# Altium PCB UF_Servo.PcbDoc (part 3 of 12)
Units mm, origin at the board's own origin, x right, y up, seen from the top; angles counter-clockwise.
Board outline 222.63 x 100.1 mm, 6 copper layers (L1, L2, L3, L4, L5, L6), stack 1.609 mm thick; 1138 components, 775 nets, 3720 pads, 1641 vias.
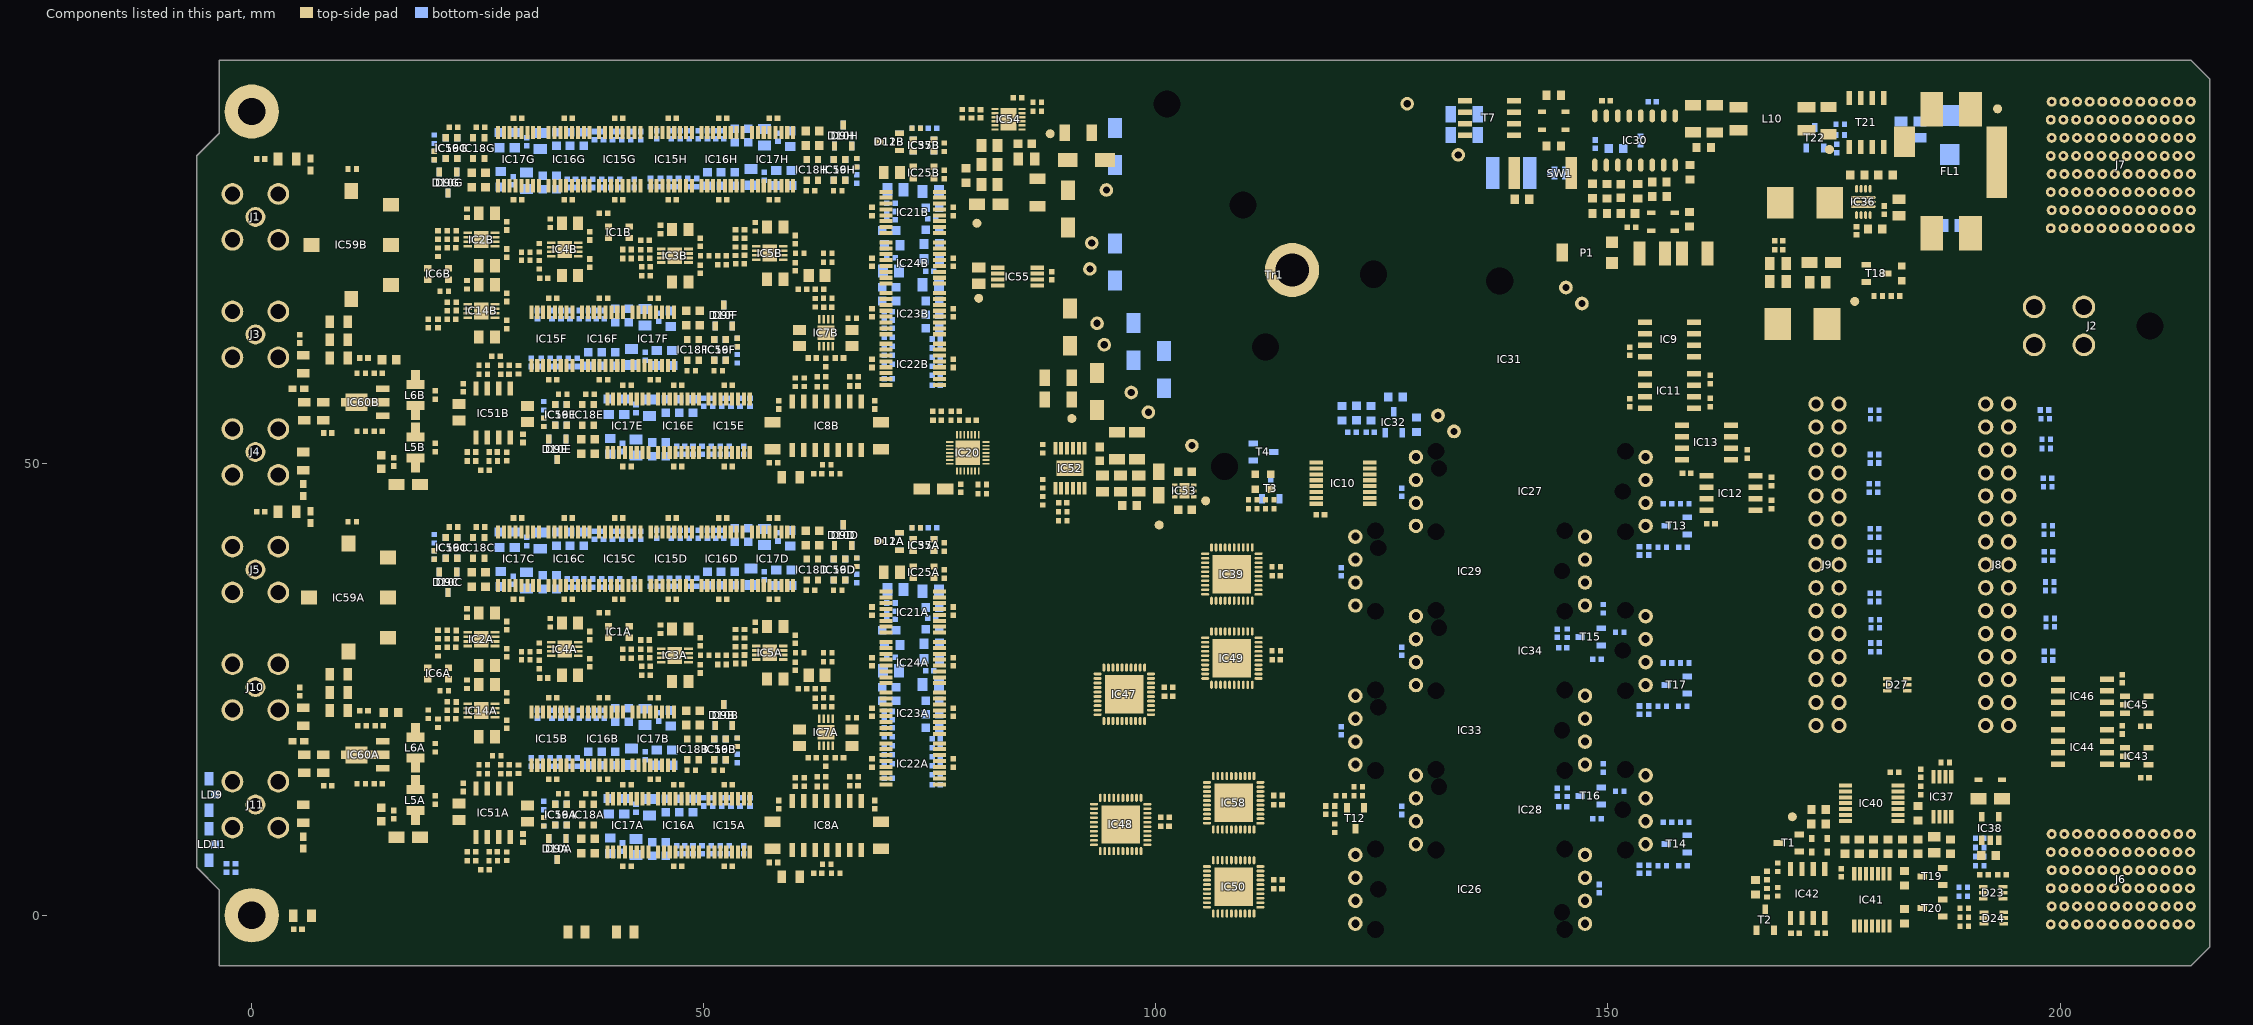
[diagram p7: the components of this part, seen from the top]

## Footprints (in the part's own frame and the unit in brackets; to place one, negate y for a bottom-side part, rotate by r counter-clockwise, add the part's x,y. Pads: shape width x height; smd on the part's side, far side on the other; paste and mask are expansions set on the pad)
3M_N2530-6002RB [mm] "30 Contacts - Straight .100\" x .100\" Low Profile Four-Wall Header"
  round 1.7 hole 1: 1(-17.78,-1.27) 2(-17.78,1.27) 3(-15.24,-1.27) 4(-15.24,1.27) 5(-12.7,-1.27) 6(-12.7,1.27) 7(-10.16,-1.27) 8(-10.16,1.27) 9(-7.62,-1.27) 10(-7.62,1.27) 11(-5.08,-1.27) 12(-5.08,1.27) 13(-2.54,-1.27) 14(-2.54,1.27) 15(0,-1.27) 16(0,1.27) 17(2.54,-1.27) 18(2.54,1.27) 19(5.08,-1.27) 20(5.08,1.27) 21(7.62,-1.27) 22(7.62,1.27) 23(10.16,-1.27) 24(10.16,1.27) 25(12.7,-1.27) 26(12.7,1.27) 27(15.24,-1.27) 28(15.24,1.27) 29(17.78,-1.27) 30(17.78,1.27)
  silkscreen extent -22.71,-4.85 22.71,4.52, body extent -22.71,-4.11 22.71,4.52, height 9.91
AMPHENOL_132203-12 [mm] "50 Ohm Through Hole SMA Right Angle PCB Jack"
  round 2.2 hole 1.5: 1(0,0)
  round 2.4 hole 1.7: 2(-2.54,2.54) 2(-2.54,-2.54) 2(2.54,2.54) 2(2.54,-2.54)
  silkscreen extent -4,-5.1 19.12,5.1, body extent -4,-5.1 19.05,5.1, height 11.45
AMPHENOL_10052825-101LF [mm] "72 Contacts, 2mm Pitch, 6 Columns, 4 Pairs per Column, 4 Walls, Right Angle Header"
  round 1.1 hole 0.5: A1(-5,-7.65) A2(-3,-7.75) A3(-1,-7.65) A4(1,-7.75) A5(3,-7.65) A6(5,-7.75) B1(-5,-6.25) B2(-3,-6.35) B3(-1,-6.25) B4(1,-6.35) B5(3,-6.25) B6(5,-6.35) C1(-5,-4.85) C2(-3,-4.95) C3(-1,-4.85) C4(1,-4.95) C5(3,-4.85) C6(5,-4.95) D1(-5,-3.45) D2(-3,-3.55) D3(-1,-3.45) D4(1,-3.55) D5(3,-3.45) D6(5,-3.55) E1(-5,-2.05) E2(-3,-2.15) E3(-1,-2.05) E4(1,-2.15) E5(3,-2.05) E6(5,-2.15) F1(-5,-0.65) F2(-3,-0.75) F3(-1,-0.65) F4(1,-0.75) F5(3,-0.65) F6(5,-0.75) G1(-5,0.75) G2(-3,0.65) G3(-1,0.75) G4(1,0.65) G5(3,0.75) G6(5,0.65) H1(-5,2.15) H2(-3,2.05) H3(-1,2.15) H4(1,2.05) H5(3,2.15) H6(5,2.05) I1(-5,3.55) I2(-3,3.45) I3(-1,3.55) I4(1,3.45) I5(3,3.55) I6(5,3.45) J1(-5,4.95) J2(-3,4.85) J3(-1,4.95) J4(1,4.85) J5(3,4.95) J6(5,4.85) K1(-5,6.35) K2(-3,6.25) K3(-1,6.35) K4(1,6.25) K5(3,6.35) K6(5,6.25) L1(-5,7.75) L2(-3,7.65) L3(-1,7.75) L4(1,7.65) L5(3,7.75) L6(5,7.65)
  silkscreen extent -6.95,-9.45 6.95,11.85, body extent -6.95,-21.95 6.95,11.85, height 15.25
AMPHENOL_10052838-101LF [mm] "96 Contacts, 2mm Pitch, 8 Columns, 4 Pairs per Column, 4 Walls, Right Angle Header"
  round 1.1 hole 0.5: A1(-7,-7.65) A2(-5,-7.75) A3(-3,-7.65) A4(-1,-7.75) A5(1,-7.65) A6(3,-7.75) A7(5,-7.65) A8(7,-7.75) B1(-7,-6.25) B2(-5,-6.35) B3(-3,-6.25) B4(-1,-6.35) B5(1,-6.25) B6(3,-6.35) B7(5,-6.25) B8(7,-6.35) C1(-7,-4.85) C2(-5,-4.95) C3(-3,-4.85) C4(-1,-4.95) C5(1,-4.85) C6(3,-4.95) C7(5,-4.85) C8(7,-4.95) D1(-7,-3.45) D2(-5,-3.55) D3(-3,-3.45) D4(-1,-3.55) D5(1,-3.45) D6(3,-3.55) D7(5,-3.45) D8(7,-3.55) E1(-7,-2.05) E2(-5,-2.15) E3(-3,-2.05) E4(-1,-2.15) E5(1,-2.05) E6(3,-2.15) E7(5,-2.05) E8(7,-2.15) F1(-7,-0.65) F2(-5,-0.75) F3(-3,-0.65) F4(-1,-0.75) F5(1,-0.65) F6(3,-0.75) F7(5,-0.65) F8(7,-0.75) G1(-7,0.75) G2(-5,0.65) G3(-3,0.75) G4(-1,0.65) G5(1,0.75) G6(3,0.65) G7(5,0.75) G8(7,0.65) H1(-7,2.15) H2(-5,2.05) H3(-3,2.15) H4(-1,2.05) H5(1,2.15) H6(3,2.05) H7(5,2.15) H8(7,2.05) I1(-7,3.55) I2(-5,3.45) I3(-3,3.55) I4(-1,3.45) I5(1,3.55) I6(3,3.45) I7(5,3.55) I8(7,3.45) J1(-7,4.95) J2(-5,4.85) J3(-3,4.95) J4(-1,4.85) J5(1,4.95) J6(3,4.85) J7(5,4.95) J8(7,4.85) K1(-7,6.35) K2(-5,6.25) K3(-3,6.35) K4(-1,6.25) K5(1,6.35) K6(3,6.25) K7(5,6.35) K8(7,6.25) L1(-7,7.75) L2(-5,7.65) L3(-3,7.75) L4(-1,7.65) L5(1,7.75) L6(3,7.65) L7(5,7.75) L8(7,7.65)
  silkscreen extent -8.95,-9.45 8.95,11.85, body extent -8.95,-21.95 8.95,11.85, height 15.25
BROADCOM_AFBR-390525RZ [mm] "BROADCOM AFBR-390525RZ Case, Body 30.46mm L X 10.16mm W X 6.7mm H"
  round 1.6 hole 0.9: 1(-12.7,3.81) 2(-12.7,1.27) 3(-12.7,-1.27) 4(-12.7,-3.81) 5(12.7,3.81) 6(12.7,1.27) 7(12.7,-1.27) 8(12.7,-3.81)
  round 1 hole 1.85 unplated mask+0.425: 9(-10.47,4.45) 11(-10.47,-4.45) 12(10.47,4.45) 14(10.47,-4.45)
  round 1 hole 1.8 unplated mask+0.4: 10(-10.16,0) 13(10.16,-2.54)
  silkscreen extent -15.23,-5.08 15.23,5.08, body extent -15.23,-5.08 15.23,5.08, height 6.7
C100 [mm] "1mm Diameter SMD Pad"
  round 1 smd paste-0.5: 1(0,0)
CAPC1005X55N [mm] "Capacitor, Non-Polarized, Chip; 1.00mm L X 0.50mm W X 0.70mm H, IPC Medium Density"
  rect 0.62x0.62 smd: 1(-0.45,0) 2(0.45,0)
  body extent -0.52,-0.27 0.53,0.28, height 0.55
CAPC1608X87N [mm] "Chip Capacitor, Body 1.6x0.8mm IPC Medium Density"
  rect 0.95x1 smd: 1(-0.8,0) 2(0.8,0)
  body extent -0.87,-0.47 0.88,0.48, height 0.87
CAPC1608X90N [mm] "Chip Capacitor, Body 1.6x0.8mm IPC Medium Density"
  rect 0.95x0.95 smd: 1(-0.75,0) 2(0.75,0)
  body extent -0.85,-0.45 0.85,0.45, height 0.9
CAPC1810X06N [mm] "Chip Capacitor, 2-Leads, Body 1.80x1.00mm, IPC Medium Density"
  rect 1x1.15 smd: 1(-0.85,0) 2(0.85,0)
  body extent -0.95,-0.55 0.95,0.55, height 0.65
CAPC2012X95N [mm] "Chip Capacitor, Body 2.0x1.25mm, IPC Medium Density"
  rect 1.1x1.45 smd: 1(-0.9,0) 2(0.9,0)
  silkscreen extent 0,-0.58 0,0.58, body extent -1.05,-0.67 1.05,0.68, height 0.95
CAPC2012X135N [mm] "Chip Capacitor, Body 2.0x1.25mm, IPC Medium Density"
  rect 1.05x1.4 smd: 1(-0.9,0) 2(0.9,0)
  silkscreen extent 0,-0.58 0,0.58, body extent -1.05,-0.67 1.05,0.68, height 1.25
CAPC2012X140N [mm] "Chip Capacitor, Body 2.0x1.25mm, IPC Medium Density"
  rect 1.15x1.45 smd: 1(-0.9,0) 2(0.9,0)
  silkscreen extent 0,-0.58 0,0.58, body extent -1.05,-0.67 1.05,0.68, height 1.3
CAPC3216X180N [mm] "Chip Capacitor, Body 3.2x1.6mm, IPC Medium Density"
  rect 1.15x1.8 smd: 1(-1.5,0) 2(1.5,0)
  silkscreen extent -0.55,-0.8 0.55,0.8, body extent -1.7,-0.9 1.7,0.9, height 1.8
CAPC3225X200N [mm] "Chip Capacitor, Body 3.2x2.5mm, IPC Medium Density"
  rect 1.35x2.7 smd: 1(-1.4,0) 2(1.4,0)
  silkscreen extent -0.35,-1.25 0.35,1.25, body extent -1.7,-1.35 1.5,1.35, height 2
CAPC4532X250N [mm] "Chip Capacitor, 2-Leads, Body 4.5x3.2mm, IPC Medium Density"
  rect 1.5x3.5 smd: 1(-2.05,0) 2(2.05,0)
  silkscreen extent -0.95,-1.6 0.95,1.6, body extent -2.37,-1.7 2.38,1.7, height 2.5
CAPMP3216X180N [mm] "Capacitor, Polarized, Molded  Body 3.2x1.6mm, IPC Medium Density"
  rect 1.8x1.25 smd: 1(-1.3,0) 2(1.3,0)
  silkscreen extent -2.4,-0.7 0,1.25, body extent -1.7,-0.9 1.7,0.9, height 1.6
DIOM5127X229N [mm] "DO-214-AC/SMA Diode, Molded Body; 5.10mm L X 2.67mm W X 2.29mm H, IPC Medium Density"
  rect 2.2x1.55 smd: 1(-2.05,0) 2(2.05,0)
  silkscreen extent -3.42,-1.4 2.65,1.45, body extent -2.67,-1.45 2.68,1.45, height 2.29
DIOM5336X265N [mm] "DO-214-AA/SMB Diode, Molded Body; 5.34mm L X 3.625mm W X 2.65mm H, IPC Medium Density"
  rect 2.3x2.15 smd: 1(-2.15,0) 2(2.15,0)
  silkscreen extent -3.92,-1.8 2.65,1.8, body extent -2.7,-1.95 2.7,1.95, height 2.4
EATON_0402ESDA-MLP [mm] "0402, 2-Leads, Body 1.1mm L X 0.53mm W X 0.44mm H body, IPC Medium Density"
  rect 0.9x0.7 smd: 1(-0.65,0) 2(0.65,0)
  body extent -0.6,-0.3 0.6,0.3, height 0.44
FIL_MURATA_BNX02 [mm] "Block Type EMIFIL LC Combined Type, BNX02* Series"
  rect 3.8x2.5 smd: 1(-6.85,2.1) 2(6.85,2.1) 3(-6.85,-2.2) 4(6.85,-2.2)
  rect 7.9x2.3 smd: 4(1,-5.1)
  rect 3.4x2.3 smd: 4(3.25,5.1)
  silkscreen extent -5.95,-4.45 7.77,5.05, body extent -6.05,-4.55 6.05,4.55, height 3.1
IND_MURATA_LQH32C [mm] "Chip Inductor, 3.40mm L X 2.50mm W X 2.20mm H, MURATA LQH32 Series"
  rect 1.2x1 smd: 1(-2.15,0) 2(2.15,0)
  rect 1x2 smd: 1(-1.15,0) 2(1.15,0)
  silkscreen extent -2.05,-1.4 2.05,1.4, body extent -1.75,-1.25 1.75,1.25, height 2.2
IND_WURTH_WE-LHMI_7050 [mm] "SMD Power Inductor (We-LHMI Series), Body 7.6x6.9mm"
  rect 2.95x3.5 smd: 1(-2.725,0) 2(2.725,0)
  L1 keep-out region: 1.1,-3.45 1.1,3.45 -1.1,3.45 -1.1,-3.45
  silkscreen extent -3.8,-3.45 3.8,3.45, body extent -3.65,-3.3 3.65,3.3, height 4.8
IND_WURTH_WE-SL2 [mm] "Common Mode SMD Line Filter WE-SL2"
  rect 2x1.2 smd: 1(-3.75,1.27) 2(-3.75,-1.27) 3(3.75,-1.27) 4(3.75,1.27)
  silkscreen extent -4.75,-3.15 4.75,3.15, body extent -4.75,-3.15 4.75,3.15, height 5.3
INDC1608X95N [mm] "Chip Inductor, 2-Leads, EIA 0603, Metric 1608, Body 1.6x0.8mm, IPC Medium Density"
  rect 0.95x1 smd: 1(-0.8,0) 2(0.8,0)
  body extent -0.87,-0.47 0.88,0.48, height 0.95
INDC2113X60N [mm] "Chip Inductor, EIA 0805, Metric 2012, Body 2.1x1.25mm, IPC Medium Density"
  rect 1.2x1.45 smd: 1(-0.9,0) 2(0.9,0)
  body extent -1.05,-0.62 1.05,0.63, height 0.6
JUMPSMD0805_G50 [mm] "2 SMD Pads for Bound by Solder Drop - Equivalent Size 0805 - Gap 0.5mm"
  rect 0.475x0.45 smd paste-0.225: 1(-1.188,0) 2(1.188,0)
  rect 0.7x1.4 smd paste-0.35: 1(-0.6,0) 2(0.6,0)
  L1 region: -0.25,0.7 -0.95,0.7 -1.425,0.225 -1.425,-0.225 -0.95,-0.7 -0.25,-0.7
  L1 region: 0.25,-0.7 0.95,-0.7 1.425,-0.225 1.425,0.225 0.95,0.7 0.25,0.7
  L1 keep-out region: -0.05,0.7 0.05,0.7 0.05,-0.7 -0.05,-0.7
LED_AVAGO_HSMC-C110 [mm] "Red Chip LED, 2-Leads, Body 3.3x1.6mm, Side Emitting Package"
  rect 1.5x1 smd: 1(-1.75,0) 2(1.75,0)
  rect 0.9x0.9 smd: 3(0,-0.65)
  silkscreen extent -1.87,-1.28 0.86,1.3, body extent -1.65,-0.3 1.65,1.29, height 1
LED_AVAGO_HSME-C110 [mm] "Green Chip LED, 2-Leads, Body 3.3x1.6mm, Side Emitting Package"
  rect 1.5x1 smd: 1(-1.75,0) 2(1.75,0)
  rect 0.9x0.9 smd: 3(0,-0.65)
  silkscreen extent -1.87,-1.28 0.86,1.3, body extent -1.65,-0.3 1.65,1.29, height 1
LED_KINGBRIGHT_KP-1608CGCK [mm] "SMT Green LED, Case 0603, Body L 1.60mm x W 0.80mm x H 1.10mm"
  rect 0.8x0.8 smd: 1(-0.825,0) 2(0.825,0)
  silkscreen extent -1.82,-0.4 0.08,0.4, body extent -0.8,-0.4 0.8,0.4, height 1.1
MINI-CIRCUITS_DF782 [mm] "MINI-CIRCUITS DF782 Case, 1.50mm pitch; 4 pin, 2.44mm W X 4.49mm L"
  rect 0.71x1.5 smd: 1(-1.5,-1.915) 3(1.5,-1.915)
  rect 0.917x2.41 smd: 2(0,-1.46)
  rect 0.92x0.493 smd: 4(0,2.418)
  rect 1.905x2.427 smd: 4(0,0.958)
  L1 region: -0.457,-0.751 -0.953,-0.255 -0.953,2.172 -0.46,2.665 0.46,2.665 0.953,2.172 0.953,-0.255 0.457,-0.751 0.457,-2.665 -0.457,-2.665
  silkscreen extent -2.3,-1.3 2.3,1.3, body extent -2.3,-2.12 2.3,2.12, height 1.6
MINI-CIRCUITS_TTT167 [mm] "MINI-CIRCUITS TTT167 Case, 6 pin, 9.65mm W X 12.7mm L"
  rect 1.78x1.52 smd: 1(5.97,0) 2(-5.97,0)
  rect 1.52x1.78 smd: 3(0,-4.38) 4(0,4.38) 5(-4.44,-4.38) 6(4.44,-4.38)
  L1 region: -7.112,-1.903 -3.81,-1.903 -3.81,1.903 -7.112,1.903 -7.112,5.588 7.112,5.588 7.112,1.903 3.81,1.903 3.81,-1.903 7.112,-1.903 7.112,-5.588 1.903,-5.588 1.903,-2.22 -1.903,-2.22 -1.903,-5.588 -7.112,-5.588
  silkscreen extent -6.35,-6.13 6.35,4.83, body extent -6.35,-4.82 6.35,4.83, height 5.84
MOLEX_39-30-0040 [mm] "4.20mm (.165\") Pitch Mini-Fit Jr. Header, Dual Row, Right Angle with Snap-in Plastic Peg PCB Lock, 4 Circuits"
  round 2.5 hole 1.8: 1(-2.1,2.75) 2(2.1,2.75) 3(-2.1,-2.75) 4(2.1,-2.75)
  round 1 hole 3 unplated mask+1: 5(0,10.05)
  silkscreen extent -5.2,-1.24 4.8,16.28, body extent -5.2,-3.28 4.8,16.65, height 11.4
MTG300 [mm] "Non Plated Through Hole: Hole Dia.=3.0mm"
  round 0.5 hole 3 unplated mask+1.25: 1(0,0)
MTG300_600 [mm] "Plated Through Hole: Hole Dia.=3.0mm Pad Dia.=6.0mm"
  round 6 hole 3: 1(0,0)
OPI1264C [mil] "Low‐cost plastic housing"
  round 60 hole 30: 1(393.7,-49.21) 2(393.7,49.21) 3(-393.7,49.21) 4(-393.7,-49.21)
  silkscreen extent -350,-128 350,128, body extent -403,-129 404,130, height 230
PANASONIC_AQY22(SON) [mm] "PANASONIC Serie AQY22(SON)  Small Outline No Lead, 4 pins, 2.2x2.95mm"
  rect 0.8x0.7 smd: 1(-1.15,0.635) 2(-1.15,-0.635) 3(1.15,-0.635) 4(1.15,0.635)
  silkscreen extent -2.35,-1.1 0.4,1.1, body extent -1.47,-1.1 1.48,1.1, height 1.4
QFN40P400X400X100-29N-S270 [mm] "QFN, 0.40mm Pitch, Square; 28 Pin, 4.00mm L X 4.00mm W X 0.80mm H Body (w/Thermal Tab 2.7x2.7mm), IPC Medium Density"
  rect 0.8x0.2 smd: 1(-2,1.2) 2(-2,0.8) 3(-2,0.4) 4(-2,0) 5(-2,-0.4) 6(-2,-0.8) 7(-2,-1.2) 15(2,-1.2) 16(2,-0.8) 17(2,-0.4) 18(2,0) 19(2,0.4) 20(2,0.8) 21(2,1.2)
  rect 0.2x0.8 smd: 8(-1.2,-2) 9(-0.8,-2) 10(-0.4,-2) 11(0,-2) 12(0.4,-2) 13(0.8,-2) 14(1.2,-2) 22(1.2,2) 23(0.8,2) 24(0.4,2) 25(0,2) 26(-0.4,2) 27(-0.8,2) 28(-1.2,2)
  rect 2.7x2.7 smd: 29(0,0)
  silkscreen extent -3.12,-2 2,2, body extent -2,-2 2,2, height 1
QFN50P600X600X80-41N-S425 [mm] "QFN, 0.50mm Pitch, Square; 40 Pin, 6.00mm L X 6.00mm W X 0.80mm H body (w/Thermal Tab 4.25 x 4.25mm), IPC Medium Density"
  oval 0.9x0.3 smd: 1(-2.95,2.25) 2(-2.95,1.75) 3(-2.95,1.25) 4(-2.95,0.75) 5(-2.95,0.25) 6(-2.95,-0.25) 7(-2.95,-0.75) 8(-2.95,-1.25) 9(-2.95,-1.75) 10(-2.95,-2.25) 21(2.95,-2.25) 22(2.95,-1.75) 23(2.95,-1.25) 24(2.95,-0.75) 25(2.95,-0.25) 26(2.95,0.25) 27(2.95,0.75) 28(2.95,1.25) 29(2.95,1.75) 30(2.95,2.25)
  oval 0.3x0.9 smd: 11(-2.25,-2.95) 12(-1.75,-2.95) 13(-1.25,-2.95) 14(-0.75,-2.95) 15(-0.25,-2.95) 16(0.25,-2.95) 17(0.75,-2.95) 18(1.25,-2.95) 19(1.75,-2.95) 20(2.25,-2.95) 31(2.25,2.95) 32(1.75,2.95) 33(1.25,2.95) 34(0.75,2.95) 35(0.25,2.95) 36(-0.25,2.95) 37(-0.75,2.95) 38(-1.25,2.95) 39(-1.75,2.95) 40(-2.25,2.95)
  rect 4.25x4.25 smd: 41(0,0)
  silkscreen extent -4.12,-3 3,3, body extent -3,-3 3,3, height 0.8
RESC1005X40N [mm] "Chip Resistor, EIA 0402, Metric 1005, Body 1.0x0.5mm, IPC Medium Density"
  rect 0.58x0.62 smd: 1(-0.47,0) 2(0.47,0)
  body extent -0.52,-0.27 0.53,0.28, height 0.4
RESC1608X55N [mm] "Chip Resistor, EIA 0603, Metric 1608, Body 1.6x0.8mm, IPC Medium Density"
  rect 0.9x1 smd: 1(-0.8,0) 2(0.8,0)
  body extent -0.87,-0.47 0.88,0.48, height 0.55
RESC2012X60N [mm] "Chip Resistor, EIA 0805, Metric 2012, Body 2.0x1.2mm, IPC Medium Density"
  rect 0.95x1.4 smd: 1(-1,0) 2(1,0)
  silkscreen extent 0,-0.55 0,0.55, body extent -1.1,-0.67 1.1,0.68, height 0.6
RESC2113X55N [mm] "Chip Resistor, EIA 0805, Metric 2113, Body 2.05x1.3mm, IPC Medium Density"
  rect 1x1.45 smd: 1(-0.95,0) 2(0.95,0)
  silkscreen extent 0,-0.55 0,0.55, body extent -1,-0.62 1,0.63, height 0.55
RESC6532X80N [mm] "Resistor, Chip; 6.5mm L X 3.25mm W X 0.80mm H, IPC Medium Density"
  rect 1.3x3.5 smd: 1(-3.15,0) 2(3.15,0)
  silkscreen extent -2.15,-1.65 2.15,1.65, body extent -3.25,-1.62 3.25,1.63, height 0.8
RTNC-40X25X15(M-083) [mm] "40x25x15mm AL=99000 Nanoperm Core"
  round 1.5 hole 0.8: 1(-22,-4) 2(-22,4) 3(20.536,-8.846) 4(22.159,-2.994) 5(22.36,-0.119) 6(21.568,5.902) 7(8.266,-20.777) 8(13.552,-17.786) 9(15.727,-15.895) 10(19.424,-11.077)
  silkscreen extent -22,-20.21 22.32,20, body extent -20,-20 20,19.89, height 15
SOD2512X110N [mm] "Small Outline Diode (SOD-323), 1.70mm W X 1.25mm L X 1.10mm H body,  IPC Medium Density"
  rect 0.9x0.5 smd: 1(-1.3,0) 2(1.3,0)
  silkscreen extent -1.63,-0.65 0.85,0.87, body extent -1.35,-0.67 1.35,0.68, height 1.1
SOD-523F [mm] "Small Outline Diode Flat Lead (SOD-523F), Body; 1.80mm L X 1mm W X 0.85mm H"
  rect 0.6x0.8 smd: 1(-0.85,0) 2(0.85,0)
  silkscreen extent -1.88,-0.5 0.2,0.52, body extent -0.91,-0.5 0.89,0.5, height 0.85
SOIC127P600X175-8N [mm] "SOIC 8, Pitch 1.27mm - Body 4x5mm, IPC Medium Density"
  rect 1.55x0.6 smd: 1(-2.7,1.905) 2(-2.7,0.635) 3(-2.7,-0.635) 4(-2.7,-1.905) 5(2.7,-1.905) 6(2.7,-0.635) 7(2.7,0.635) 8(2.7,1.905)
  silkscreen extent -2.52,-2.5 1.55,2.88, body extent -3.1,-2.5 3.1,2.5, height 1.75
SOIC127P600X175-14N [mm] "SOIC 14, Pitch 1.27mm - Body 4x8.75mm, IPC Medium Density"
  rect 1.55x0.6 smd: 1(-2.7,3.81) 2(-2.7,2.54) 3(-2.7,1.27) 4(-2.7,0) 5(-2.7,-1.27) 6(-2.7,-2.54) 7(-2.7,-3.81) 8(2.7,-3.81) 9(2.7,-2.54) 10(2.7,-1.27) 11(2.7,0) 12(2.7,1.27) 13(2.7,2.54) 14(2.7,3.81)
  silkscreen extent -2.52,-4.4 1.55,4.79, body extent -3.1,-4.37 3.1,4.38, height 1.75
SON45P300X300X80-13N-R175X248 [mm] "SON, 0.45mm Pitch; 12 Pin, 3.00mm W X 3.00mm L X 0.80mm H Body (w/Thermal tab 1.75 x 2.48mm), IPC Medium Density"
  rect 0.8x0.25 smd: 1(-1.5,1.125) 2(-1.5,0.675) 3(-1.5,0.225) 4(-1.5,-0.225) 5(-1.5,-0.675) 6(-1.5,-1.125) 7(1.5,-1.125) 8(1.5,-0.675) 9(1.5,-0.225) 10(1.5,0.225) 11(1.5,0.675) 12(1.5,1.125)
  rect 1.75x2.45 smd paste-0.37: 13(0,0)
  silkscreen extent -2.53,1 -2.28,1.25, body extent -1.5,-1.5 1.5,1.5, height 0.8
SON50P300X300X90-9N-R160X189 [mm] "SON (DFN), 0.50mm pitch, 8 pin, 3mm X 3mm X 0.9mm H body (w/thermal tab 1.6 X 1.89mm),  IPC Medium Density"
  rect 0.95x0.3 smd: 1(-1.5,0.75) 2(-1.5,0.25) 3(-1.5,-0.25) 4(-1.5,-0.75) 5(1.5,-0.75) 6(1.5,-0.25) 7(1.5,0.25) 8(1.5,0.75)
  rect 1.6x1.85 smd: 9(0,0)
  silkscreen extent -2.57,-1.5 1.5,1.5, body extent -1.62,-1.62 1.63,1.63, height 0.9
SON65P200X200X80-7N-R110X170 [mm] "SON, 0.65mm, Pitch; 6 Pin,2.00mm W X 2.00mm L X 0.80mm H body (W/Thermal Tab 1.1mm X 1.7mm),  IPC Medium Density"
  rect 0.6x0.35 smd: 1(-1.05,0.65) 2(-1.05,0) 3(-1.05,-0.65) 4(1.05,-0.65) 5(1.05,0) 6(1.05,0.65)
  rect 1.1x1.7 smd: 7(0,0)
  silkscreen extent -1.97,0.53 -1.73,0.77, body extent -1.05,-1.05 1.05,1.05, height 0.77
SOP65P490X109-8N [mm] "SOP, 0.65mm pitch; 8 pin,3.00mm W X 3.00mm L X 1.09mm H bodyI, PC Medium Density"
  rect 1.5x0.45 smd: 1(-2.2,0.975) 2(-2.2,0.325) 3(-2.2,-0.325) 4(-2.2,-0.975) 5(2.2,-0.975) 6(2.2,-0.325) 7(2.2,0.325) 8(2.2,0.975)
  silkscreen extent -2.83,-1.5 1.1,1.82, body extent -2.45,-1.55 2.45,1.55, height 1.09
SOP65P490X110-8N [mm] "SOP, 0.65mm pitch; 8 pin, 3.00mm W X 3.00mm L X 1.10mm H body, IPC Medium Density"
  rect 1.5x0.45 smd: 1(-2.2,0.975) 2(-2.2,0.325) 3(-2.2,-0.325) 4(-2.2,-0.975) 5(2.2,-0.975) 6(2.2,-0.325) 7(2.2,0.325) 8(2.2,0.975)
  silkscreen extent -2.83,-1.5 1.12,1.82, body extent -2.45,-1.55 2.45,1.55, height 1.1
SOP65P490X110-13N-R175X294 [mm] "SOP,0.65mm pitch;12 pin,3.00mm W X 4.039mm L X 1.10mm H body, (w/thermal tab 1.75 X 2.94 mm), IPC Medium Density"
  rect 1.4x0.45 smd: 1(-2.2,1.625) 2(-2.2,0.975) 3(-2.2,0.325) 4(-2.2,-0.325) 5(-2.2,-0.975) 6(-2.2,-1.625) 7(2.2,-1.625) 8(2.2,-0.975) 9(2.2,-0.325) 10(2.2,0.325) 11(2.2,0.975) 12(2.2,1.625)
  rect 1.75x2.94 smd: 13(0,0)
  silkscreen extent -2.77,-2 1.15,2.48, body extent -2.45,-2.07 2.45,2.07, height 1.1
SOP65P640X110-14N [mm] "SOP, 14-Leads, Body 4.4x5mm (max), Pitch 0.65mm, IPC Medium Density"
  rect 1.45x0.45 smd: 1(-2.9,1.95) 2(-2.9,1.3) 3(-2.9,0.65) 4(-2.9,0) 5(-2.9,-0.65) 6(-2.9,-1.3) 7(-2.9,-1.95) 8(2.9,-1.95) 9(2.9,-1.3) 10(2.9,-0.65) 11(2.9,0) 12(2.9,0.65) 13(2.9,1.3) 14(2.9,1.95)
  silkscreen extent -3.47,-2.5 1.82,2.82, body extent -3.12,-2.55 3.12,2.55, height 1.1
SOP65P640X110-16N [mm] "SOP, 0.65mm pitch; 16 pin, 4.40mm W X 5.00mm L X 1.10mm H body IPC Medium Density"
  rect 1.5x0.45 smd: 1(-2.95,2.275) 2(-2.95,1.625) 3(-2.95,0.975) 4(-2.95,0.325) 5(-2.95,-0.325) 6(-2.95,-0.975) 7(-2.95,-1.625) 8(-2.95,-2.275) 9(2.95,-2.275) 10(2.95,-1.625) 11(2.95,-0.975) 12(2.95,-0.325) 13(2.95,0.325) 14(2.95,0.975) 15(2.95,1.625) 16(2.95,2.275)
  silkscreen extent -3.58,-2.5 1.88,3.12, body extent -3.12,-2.55 3.12,2.55, height 1.1
SOP65P640X120-16N [mm] "SOP, 0.65mm pitch; 16 pin, 4.40mm W X 5.00mm L X 1.20mm H body IPC Medium Density"
  rect 1.45x0.45 smd: 1(-2.95,2.275) 2(-2.95,1.625) 3(-2.95,0.975) 4(-2.95,0.325) 5(-2.95,-0.325) 6(-2.95,-0.975) 7(-2.95,-1.625) 8(-2.95,-2.275) 9(2.95,-2.275) 10(2.95,-1.625) 11(2.95,-0.975) 12(2.95,-0.325) 13(2.95,0.325) 14(2.95,0.975) 15(2.95,1.625) 16(2.95,2.275)
  silkscreen extent -3.07,-2.55 1.85,3.17, body extent -3.12,-2.55 3.12,2.55, height 1.2
SOP127P600X175-16N [mm] "SOP, 16-Leads, Body 9.90x3.90mm, Pitch 1.27mm, IPC Medium Density"
  oval 1.45x0.6 smd: 1(-2.725,4.445) 2(-2.725,3.175) 3(-2.725,1.905) 4(-2.725,0.635) 5(-2.725,-0.635) 6(-2.725,-1.905) 7(-2.725,-3.175) 8(-2.725,-4.445) 9(2.725,-4.445) 10(2.725,-3.175) 11(2.725,-1.905) 12(2.725,-0.635) 13(2.725,0.635) 14(2.725,1.905) 15(2.725,3.175) 16(2.725,4.445)
  silkscreen extent -2.85,-5 1.6,5.42, body extent -3,-5 3,5, height 1.75
SOT65P210X110-6N [mm] "SOT363, SC70-6, SOT, 0.65mm Pitch, 6 Pin, 1.25mm W X 2.00mm L X 1.10mm H, IPC Medium Density"
  rect 0.95x0.4 smd: 1(-1.1,0.65) 2(-1.1,0) 3(-1.1,-0.65) 4(1.1,-0.65) 5(1.1,0) 6(1.1,0.65)
  silkscreen extent -0.27,-1 0.27,1, body extent -1.2,-1.1 1.2,1.1, height 1.1
SOT95P230X110-3N [mm] "SOT23, 3 pin, Pitch 0.95mm - 1.3mm W X 2.9mm L X 1.1mm H, IPC Medium Density"
  rect 1x0.6 smd: 1(-1.15,0.95) 2(-1.15,-0.95) 3(1.15,0)
  silkscreen extent -1.52,-1.45 0.33,1.88, body extent -1.08,-1.5 1.25,1.5, height 1.1
SOT95P237X112-3N [mm] "SOT, 0.95mm, pitch; 3 pin,1.30mm W X 2.92mm L X 1.12mm H body, IPC Medium Density"
  rect 1.05x0.6 smd: 1(-1.15,0.95) 2(-1.15,-0.95) 3(1.15,0)
  silkscreen extent -0.3,-1.45 0.3,1.45, body extent -1.25,-1.5 1.25,1.5, height 1.1
SOT95P240X110-3N [mm] "SOT23 3-Leads, Pitch 0.95mm, Body 1.3x2.9mm, IPC Medium Density"
  rect 1.05x0.65 smd: 1(-1.15,0.95) 2(-1.15,-0.95) 3(1.15,0)
  silkscreen extent -1.51,-1.45 0.3,1.75, body extent -1.25,-1.5 1.25,1.5, height 1.1
SOT95P280X145-5N [mm] "SOT, 0.95mm pitch; 5 pin, 1.60mm W X 2.90mm L X 1.45mm H body, IPC Medium Density"
  rect 1.1x0.6 smd: 1(-1.3,0.95) 2(-1.3,0) 3(-1.3,-0.95) 4(1.3,-0.95) 5(1.3,0.95)
  silkscreen extent -1.72,-1.45 0.43,1.88, body extent -1.4,-1.5 1.4,1.5, height 1.45
TEXAS_RGX0011A [mm] "TEXAS Case Style (R-VQFN-HR-N11), 0.50mm Pitch, 11-pin, 2.00mm W X 3.00mm L X 1.00mm H Body"
  oval 2.75x0.3 smd: 1(0,0.5) 2(0,0) 3(0,-0.5)
  oval 0.3x0.85 smd: 4(-0.75,-1.45) 5(-0.25,-1.45) 6(0.25,-1.45) 7(0.75,-1.45) 8(0.75,1.45) 9(0.25,1.45) 10(-0.25,1.45) 11(-0.75,1.45)
  body extent -1,-1.5 1,1.5, height 1
TRIM_BOURNS_3314G-1 [mm] "Bourns 3314G-1 Single Turn 4mm Square Trimpot® Trimming Potentiometer (Top Adjust)"
  rect 1.3x1.3 smd: 1(1.15,-2.75) 3(-1.15,-2.75)
  rect 2x1.3 smd: 2(0,2.75)
  silkscreen extent -2.5,-2.24 2.5,2.24, body extent -2.5,-3.1 2.5,3.1, height 2.73
WURTH_9774010151 [mm] "5.1mm Diameter, SMT Steel Spacer Bush with Internal Thread M2.5"
  round 6 / inner round 0 / far side round 0 hole 3.7 unplated paste-2539.97: 1(0,0)
  body extent -2.55,-2.55 2.55,2.55, height 1

## Part data
B1 B2 B3 B4 B12 B15 B16 B30 B31 B32: library part SMD_PAD_D1MM, "Pad", Author="CERN DEM JLC", Component Type="Standard (No BOM)", ComponentHeight=0mm, CreateDate=10/10/2017, Family="SMD Pad", HelpURL=Undefined, LatestRevisionDate=10/10/2017, Mounted=No, PackageDescription="1mm Diameter SMD Pad", Part Description="1mm Diameter SMD Pad", Part Number=SMD_PAD_D1MM, Pin Count=1, Sense=No, SMD=Yes, Socket=No, Status=None
B36 B37 B38 B39 B40 B41: library part NON-PLATED_HOLE3.0, "Single Terminal Socket", Author="CERN DEM JLC", Component Type="Standard (No BOM)", ComponentHeight=0mm, CreateDate=5/26/2008, Family="Non Plated Hole", HelpURL=Undefined, LatestRevisionDate=5/26/2008, Mounted=No, PackageDescription="Non Plated Through Hole: Hole Dia.=3.0mm", Part Description="Non Plated Through Hole: Hole Dia.=3.0mm", Part Number=NON-PLATED_HOLE3.0, Pin Count=1, Sense=No, SMD=No, Socket=No, Status=None
BUSH1: library part WURTH_9774010151, "Threaded Bush", Manufacturer=WURTH, Manufacturer Part Number=9774010151, Author="CERN DEM HF", Component Type=Standard, ComponentHeight=1.1mm, CreateDate=11/1/2022, HelpURL=\\cern.ch\dfs\Applications\Altium\Datasheets\WURTH_9774010151.pdf, LatestRevisionDate=11/1/2022, Mounted=Yes, PackageDescription="5.1mm Diameter, SMT Steel Spacer Bush with Internal Thread M2.5", Part Description="5.1mm Diameter, SMT Steel Spacer Bush with Internal Thread M2.5", Part Number=WURTH_9774010151, Pin Count=1, PressFit=No, Sense=No, SMD=Yes, Socket=No, Status=None
C1 C4A C4B C8A C8B C11A C11B C13A C13B C15A C15B C17A C17B C22A C22B C24A C24B C27A C27B C29A C29B C31A C31B C33A C33B C35A C35B C38A C38B C45A C45B C45C C45D C45E C45F C45G C45H C46A C46B C46C C46D C46E C46F C46G C46H C56 C57 C58 C59 C60 C62A C62B C62C C62D C62E C62F C62G C62H C63A C63B C63C C63D C63E C63F C63G C63H C76A C76B C76C C76D C76E C76F C76G C76H C77A C77B C77C C77D C77E C77F C77G C77H C83A C83B C86A C86B C89A C89B C95A C95B C96A C96B C103A C103B C104A C104B C115A C115B C116A C116B C121 C122 C124 C126 C127 C128 C132 C133 C136 C141 C145 C147 C148 C149 C151 C153 C158 C159 C164 C166 C169 C177A C177B C178A C178B C180 C181 C184 C185 C186 C187 C188 C189A C189B C191 C193 C194 C213 C215 C219 C220 C221A C221B C222A C222B C223A C223B C298 C306 C307: library part CC0402_100NF_50V_10%_X7R, "Non-polarised capacitor", Case=0402, Manufacturer=GENERIC, Manufacturer1 ComponentHeight=0.55mm, Manufacturer1 Example=MURATA, Manufacturer1 Part Number=GRM155R71H104KE14D, Tolerance=±10%, Voltage=50V, Author="CERN DEM MR", Component Type=Standard, HelpURL=\\cern.ch\dfs\Applications\Altium\Datasheets\CC0402_MURATA_GRM155R71H104KE14D.pdf, Manufacturer Part Number=CC0402_100NF_50V_10%_X7R, Mounted=Yes, Part Description="SMD Multilayer Chip Ceramic Capacitor", Part Number=CC0402_100NF_50V_10%_X7R, Pin Count=2, Sense=No, SMD=Yes, Socket=No, Status=None, TC=X7R
  C1 C158 C159 C164 C166 C169 C180 C181 C219 C220 C298 C306 C307: CreateDate=30.06.2017, LatestRevisionDate=30.06.2017
  C4A C4B C8A C8B C11A C11B C13A C13B C15A C15B C17A C17B C22A C22B C24A C24B C27A C27B C29A C29B C31A C31B C33A C33B C35A C35B C38A C38B C45A C45B C45C C45D C45E C45F C45G C45H C46A C46B C46C C46D C46E C46F C46G C46H C56 C57 C58 C59 C60 C62A C62B C62C C62D C62E C62F C62G C62H C63A C63B C63C C63D C63E C63F C63G C63H C76A C76B C76C C76D C76E C76F C76G C76H C77A C77B C77C C77D C77E C77F C77G C77H C83A C83B C86A C86B C89A C89B C95A C95B C96A C96B C103A C103B C104A C104B C115A C115B C116A C116B C121 C122 C124 C126 C127 C128 C132 C133 C136 C141 C145 C147 C148 C149 C151 C153 C177A C177B C178A C178B C184 C185 C186 C187 C188 C189A C189B C191 C193 C194 C213 C215 C221A C221B C222A C222B C223A C223B: CreateDate=6/30/2017, LatestRevisionDate=6/30/2017
C2: library part CC0402_22PF_50V_5%_C0G, "Non-polarised capacitor", Case=0402, Manufacturer=GENERIC, Manufacturer1 ComponentHeight=0.55mm, Manufacturer1 Example=KEMET, Manufacturer1 Part Number=C0402C220J5GACTU, Tolerance=±5%, Voltage=50V, Author="CERN DEM JLC", Component Type=Standard, CreateDate=2007-12-03, HelpURL="\\cern.ch\dfs\Applications\Altium\Datasheets\CC0402_C0G_KEMET_(Commercial Grade).pdf", LatestRevisionDate=2007-12-03, Manufacturer Part Number=CC0402_22PF_50V_5%_C0G, Mounted=Yes, Part Description="SMD Multilayer Chip Ceramic Capacitor", Part Number=CC0402_22PF_50V_5%_C0G, Pin Count=2, Sense=No, SMD=Yes, Socket=No, Status=Preferred, TC=C0G/NP0
C3A C3B C23A C23B: library part CC0402_10PF_50V_5%_C0G, "Non-polarised capacitor", Case=0402, Manufacturer=GENERIC, Manufacturer1 ComponentHeight=0.55mm, Manufacturer1 Example=KEMET, Manufacturer1 Part Number=C0402C100J5GACTU, Tolerance=±5%, Voltage=50V, Author="CERN DEM JLC", Component Type=Standard, CreateDate=12/3/2007, HelpURL="\\cern.ch\dfs\Applications\Altium\Datasheets\CC0402_C0G_KEMET_(Commercial Grade).pdf", LatestRevisionDate=4/22/2015, Manufacturer Part Number=CC0402_10PF_50V_5%_C0G, Mounted=Yes, Part Description="SMD Multilayer Chip Ceramic Capacitor", Part Number=CC0402_10PF_50V_5%_C0G, Pin Count=2, Sense=No, SMD=Yes, Socket=No, Status=Preferred, TC=C0G/NP0
C5A C5B C12A C12B C14A C14B C16A C16B C18A C18B C21A C21B C25A C25B C26A C26B C28A C28B C30A C30B C32A C32B C37A C37B C94A C94B C170 C171 C172 C190A C190B C200 C201 C202 C207 C208 C209: library part CC0805_10UF_25V_10%_X5R, "Non-polarised capacitor", Case=0805, Manufacturer=GENERIC, Manufacturer1 ComponentHeight=0.95mm, Manufacturer1 Example=MURATA, Manufacturer1 Part Number=GRM219R61E106KA12D, Tolerance=±10%, Voltage=25V, Author="CERN DEM JLC", Component Type=Standard, HelpURL=\\cern.ch\dfs\Applications\Altium\Datasheets\CC0805_X5R_MURATA_GRM.pdf, Manufacturer Part Number=CC0805_10UF_25V_10%_X5R, Mounted=Yes, Part Description="SMD Multilayer Chip Ceramic Capacitor", Part Number=CC0805_10UF_25V_10%_X5R, Pin Count=2, Sense=No, SMD=Yes, Socket=No, Status=Preferred, TC=X5R
  C5A C5B C12A C12B C14A C14B C16A C16B C18A C18B C21A C21B C25A C25B C26A C26B C28A C28B C30A C30B C32A C32B C37A C37B C94A C94B C190A C190B C200 C201 C202 C207 C208 C209: CreateDate=10/25/2012, LatestRevisionDate=9/6/2016
  C170 C171 C172: CreateDate=25.10.2012, LatestRevisionDate=06.09.2016
C6A C6B: library part CC0402_100PF_50V_5%_C0G, "Non-polarised capacitor", Case=0402, Manufacturer=GENERIC, Manufacturer1 ComponentHeight=0.55mm, Manufacturer1 Example=KEMET, Manufacturer1 Part Number=C0402C101J5GACTU, Tolerance=±5%, Voltage=50V, Author="CERN DEM JLC", Component Type=Standard, CreateDate=12/3/2007, HelpURL="\\cern.ch\dfs\Applications\Altium\Datasheets\CC0402_C0G_KEMET_(Commercial Grade).pdf", LatestRevisionDate=4/22/2015, Manufacturer Part Number=CC0402_100PF_50V_5%_C0G, Mounted=Yes, Part Description="SMD Multilayer Chip Ceramic Capacitor", Part Number=CC0402_100PF_50V_5%_C0G, Pin Count=2, Sense=No, SMD=Yes, Socket=No, Status=Preferred, TC=C0G/NP0
C7A C7B: library part CC0402_33PF_50V_5%_C0G, "Non-polarised capacitor", Case=0402, Manufacturer=GENERIC, Manufacturer1 ComponentHeight=0.55mm, Manufacturer1 Example=KEMET, Manufacturer1 Part Number=C0402C330J5GACTU, Tolerance=±5%, Voltage=50V, Author="CERN DEM JLC", Component Type=Standard, CreateDate=12/3/2007, HelpURL="\\cern.ch\dfs\Applications\Altium\Datasheets\CC0402_C0G_KEMET_(Commercial Grade).pdf", LatestRevisionDate=4/22/2015, Manufacturer Part Number=CC0402_33PF_50V_5%_C0G, Mounted=Yes, Part Description="SMD Multilayer Chip Ceramic Capacitor", Part Number=CC0402_33PF_50V_5%_C0G, Pin Count=2, Sense=No, SMD=Yes, Socket=No, Status=Preferred, TC=C0G/NP0
C9A C9B C36A C36B C167 C168 C196 C197: library part CC1206_47UF_25V_20%_X5R, "Non-polarised capacitor", Case=1206, Manufacturer=GENERIC, Manufacturer1 ComponentHeight=1.8mm, Manufacturer1 Example=TDK, Manufacturer1 Part Number=C3216X5R1E476M160, Tolerance=±20%, Voltage=25V, Author="CERN DEM JLC", Component Type=Standard, CreateDate=11/20/2013, HelpURL=\\cern.ch\dfs\Applications\Altium\Datasheets\CC1206_X5R_TDK_C.pdf, LatestRevisionDate=3/14/2017, Manufacturer Part Number=CC1206_47UF_25V_20%_X5R, Mounted=Yes, Part Description="SMD Multilayer Chip Ceramic Capacitor", Part Number=CC1206_47UF_25V_20%_X5R, Pin Count=2, Sense=No, SMD=Yes, Socket=No, Status=None, TC=X5R
C10A C10B: library part CC0402_39PF_100V_5%_C0G_MURATA_GRM1555C2A390JA01, "Non-polarised capacitor", Case=0402, Manufacturer=MURATA, Manufacturer Part Number=GRM1555C2A390JA01, Tolerance=±5%, Voltage=100V, Author="CERN DEM BC", Component Type=Standard, ComponentHeight=0.55mm, CreateDate=9/1/2020, HelpURL=\\cern.ch\dfs\Applications\Altium\Datasheets\CC0402_MURATA_GRM1555C2A390JA01.pdf, LatestRevisionDate=9/1/2020, Mounted=Yes, Part Description="Chip Multilayer Ceramic Capacitor for General Purpose", Part Number=CC0402_39PF_100V_5%_C0G_MURATA_GRM1555C2A390JA01, Pin Count=2, Sense=No, SMD=Yes, Socket=No, Status=None, TC=C0G/NP0
C19A C19B C20A C20B: library part CC0402_120PF_50V_5%_C0G, "Non-polarised capacitor", Case=0402, Manufacturer=GENERIC, Manufacturer1 ComponentHeight=0.55mm, Manufacturer1 Example=KEMET, Manufacturer1 Part Number=C0402C121J5GACTU, Tolerance=±5%, Voltage=50V, Author="CERN DEM JLC", Component Type=Standard, CreateDate=11/10/2011, HelpURL="\\cern.ch\dfs\Applications\Altium\Datasheets\CC0402_C0G_KEMET_(Commercial Grade).pdf", LatestRevisionDate=4/22/2015, Manufacturer Part Number=CC0402_120PF_50V_5%_C0G, Mounted=Yes, Part Description="SMD Multilayer Chip Ceramic Capacitor", Part Number=CC0402_120PF_50V_5%_C0G, Pin Count=2, Sense=No, SMD=Yes, Socket=No, Status=Preferred, TC=C0G/NP0
C34A C34B C123 C125 C129 C134 C150 C152 C192: library part CC0402_1UF_16V_10%_X5R, "Non-polarised capacitor", Case=0402, Manufacturer=GENERIC, Manufacturer1 ComponentHeight=0.55mm, Manufacturer1 Example=TDK, Manufacturer1 Part Number=C1005X5R1C105KT, Tolerance=±10%, Voltage=16V, Author="CERN DEM JLC", Component Type=Standard, CreateDate=10/25/2012, HelpURL=\\cern.ch\dfs\Applications\Altium\Datasheets\CC0402_X5R_TDK_C.pdf, LatestRevisionDate=10/25/2012, Manufacturer Part Number=CC0402_1UF_16V_10%_X5R, Mounted=Yes, Part Description="SMD Multilayer Chip Ceramic Capacitor", Part Number=CC0402_1UF_16V_10%_X5R, Pin Count=2, Sense=No, SMD=Yes, Socket=No, Status=Preferred, TC=X5R
C39A C39B C39C C39D C39E C39F C39G C39H C48A C48B C48C C48D C48E C48F C48G C48H C54A C54B C54C C54D C54E C54F C54G C54H C64A C64B C64C C64D C64E C64F C64G C64H C67A C67B C67C C67D C67E C67F C67G C67H C97A C97B C106A C106B C112A C112B C117A C117B C120A C120B: library part CC0402_100PF_25V_1%_C0G, "Non-polarised capacitor", Case=0402, Manufacturer=GENERIC, Manufacturer1 ComponentHeight=0.55mm, Manufacturer1 Example=KEMET, Manufacturer1 Part Number=CBR04C101F3GAC, Tolerance=±1%, Voltage=25V, Author="CERN DEM HF", Component Type=Standard, CreateDate=10/20/2022, HelpURL=\\cern.ch\dfs\Applications\Altium\Datasheets\CC0402_C0G_KEMET_HiQ-CBR.pdf, LatestRevisionDate=10/20/2022, Manufacturer Part Number=CC0402_100PF_25V_1%_C0G, Mounted=Yes, Part Description="SMD Multilayer Chip Ceramic Capacitor", Part Number=CC0402_100PF_25V_1%_C0G, Pin Count=2, Sense=No, SMD=Yes, Socket=No, Status="Not Recommended", TC=C0G/NP0
C40A C40B C40C C40D C40E C40F C40G C40H C41A C41B C41C C41D C41E C41F C41G C41H C42A C42B C42C C42D C42E C42F C42G C42H C51A C51B C51C C51D C51E C51F C51G C51H C70A C70B C70C C70D C70E C70F C70G C70H C98A C98B C99A C99B C100A C100B C109A C109B C156A C156B: library part "0402 200pF 50V", "Multilayer Ceramic Capacitor, 200 pF, 50 V, ï¿½ 1%, C0G (NP0), 0402 [1005 Metric]", Case/Package=343Case, Manufacturer=Murata, Manufacturer Part Number=GCM1555C1H201FA16D, Max Operating Temperature=125°C, Min Operating Temperature=-55°C, Supplier Part Number=81-GCM1555C1H201FA6D, Temperature Coefficient=30ppm/°C, Voltage Rating=50V, Category="Ceramic Capacitors", ComponentLink1Description=https://datasheet.octopart.com/GCM1555C1H201FA16D-Murata-datasheet-12511495.pdf?src-supplier=TME, ComponentLink1URL=https://datasheet.octopart.com/GCM1555C1H201FA16D-Murata-datasheet-12511495.pdf?src-supplier=TME, Height=550um, Length=1mm, Material=4241ConductorMaterial, Pricing="1=0.1, 10=0.035, 50=0.035, 100=0.021, 1000=0.016, 10000=0.009 (USD)", RoHS=Yes, RoHS Compliant=Yes, Stock=21118, Supplier=Mouser, Thickness=500um, Width=500um
C43A C43B C43C C43D C43E C43F C43G C43H C101A C101B: library part "0402 750pF 50V", "Cap Auto-grade 750PF 50VDC C0G 1% SMD 0402", Manufacturer=Murata, Manufacturer Part Number=GCM1555C1H751FA16D, Supplier Part Number=81-GCM1555C1H751FA6D, Category="Ceramic Capacitors", Pricing="1=0.1, 10=0.04, 50=0.04, 100=0.024, 1000=0.017, 10000=0.01 (USD)", RoHS=Yes, RoHS Compliant=Yes, Stock=21110, Supplier=Mouser
C44A C44B C44C C44D C44E C44F C44G C44H C102A C102B: library part CC0402_47PF_50V_1%_C0G_MURATA_GJM1555C1H470FB01D, "Non-polarised capacitor", Case=0402, Manufacturer=MURATA, Manufacturer Part Number=GJM1555C1H470FB01, Tolerance=±1%, Voltage=50V, Author="CERN DEM BC", Component Type=Standard, ComponentHeight=0.55mm, CreateDate=11/20/2017, HelpURL=\\cern.ch\dfs\Applications\Altium\Datasheets\CC0402_MURATA_GJM1555C1H470FB01D.pdf, LatestRevisionDate=11/20/2017, Mounted=Yes, Part Description="High-Q SMD Chip Monolithic Ceramic Capacitor", Part Number=CC0402_47PF_50V_1%_C0G_MURATA_GJM1555C1H470FB01D, Pin Count=2, Sense=No, SMD=Yes, Socket=No, Status=None, TC=C0G/NP0
C47A C47B C47C C47D C47E C47F C47G C47H C49A C49B C49C C49D C49E C49F C49G C49H C50A C50B C50C C50D C50E C50F C50G C50H C53A C53B C53C C53D C53E C53F C53G C53H C105A C105B C107A C107B C108A C108B C111A C111B: library part "0402 1.5nF 50V", "ESD SMD Auto C0G 0402 (1005Metric) Ceramic Capacitor 0.039Lx0.020W 1.00mmx0.50mm C0G NP0 ±1% 1500pF", Manufacturer=KEMET, Manufacturer Part Number=C0402C152F5GECAUTO, Supplier Part Number=80-C0402C152F5GECAUT, Category="Ceramic Capacitors", ComponentLink1Description=https://datasheet.octopart.com/C0402C152F5GECAUTO-KEMET-datasheet-154276015.pdf?src-supplier=Farnell, ComponentLink1URL=https://datasheet.octopart.com/C0402C152F5GECAUTO-KEMET-datasheet-154276015.pdf?src-supplier=Farnell, ComponentLink2Description=https://api.kemet.com/component-edge/download/datasheet/C0402C152F5GECAUTO.pdf?src-supplier=Digikey, ComponentLink2URL=https://api.kemet.com/component-edge/download/datasheet/C0402C152F5GECAUTO.pdf?src-supplier=Digikey, ComponentLink3Description=https://datasheet.octopart.com/C0402C152F5GECAUTO-KEMET-datasheet-185374772.pdf?src-supplier=Newark, ComponentLink3URL=https://datasheet.octopart.com/C0402C152F5GECAUTO-KEMET-datasheet-185374772.pdf?src-supplier=Newark, Pricing="1=0.59, 10=0.367, 50=0.367, 100=0.251, 1000=0.19, 10000=0.151 (USD)", RoHS=Yes, RoHS Compliant=Yes, Stock=2168, Supplier=Mouser
C52A C52B C52C C52D C52E C52F C52G C52H C110A C110B: library part "0603 4.7nF 50V", "Cap Ceramic 0.0047uF 50V C0G 1% Pad SMD 0603 125°C Automotive T/R", Case/Package=0603, Manufacturer=Murata, Manufacturer Part Number=GCM1885C1H472FA16D, Max Operating Temperature=125°C, Min Operating Temperature=-55°C, Supplier Part Number=81-GCM1885C1H472FA6D, Temperature Coefficient=30ppm/°C, Tolerance=1%, Voltage Rating=50V, Category="Ceramic Capacitors", Height=900um, Length=1.6mm, Material=Ceramic, Pricing="1=0.18, 10=0.102, 50=0.102, 100=0.064, 1000=0.044, 10000=0.03 (USD)", RoHS=Yes, Stock=7633, Supplier=Mouser, Thickness=800um, Width=800um
C55A C55B C55C C55D C55E C55F C55G C55H C79A C79B C79C C79D C79E C79F C79G C79H C113A C113B: library part "0603 10nF 25V", "Multilayer Ceramic Capacitors MLCC - SMD/SMT 25V 0.01uF C0G 0603 1% AEC-Q200", Manufacturer=KEMET, Manufacturer Part Number=C0603C103F3GECAUTO, Supplier Part Number=80-C0603C103F3GEAUTO, Voltage Rating (DC)=25V, Category="Ceramic Capacitors", ComponentLink1Description=https://datasheet.octopart.com/C0603C103F3GECAUTO-KEMET-datasheet-149521794.pdf?src-supplier=Farnell, ComponentLink1URL=https://datasheet.octopart.com/C0603C103F3GECAUTO-KEMET-datasheet-149521794.pdf?src-supplier=Farnell, Pricing="1=0.8, 10=0.507, 50=0.507, 100=0.354, 1000=0.284, 10000=0.239 (USD)", RoHS=Yes, RoHS Compliant=Yes, Stock=14714, Supplier=Mouser
C61A C61B C61C C61D C61E C61F C61G C61H C114A C114B: library part "0603 2.7nF 50V", "Powerrain/Safety for Automotive AEC-Q200 Up to 125C Reflow soldering Flow soldering", Manufacturer=Murata, Manufacturer Part Number=GCM1885C1H272FA16J, Supplier Part Number=81-GCM1885C1H272FA6J, Category="Ceramic Capacitors", Pricing="1=0.17, 10=0.098, 50=0.098, 100=0.061, 1000=0.042, 10000=0.029 (USD)", RoHS=Yes, RoHS Compliant=Yes, Stock=14497, Supplier=Mouser
C65A C65B C65C C65D C65E C65F C65G C65H C118A C118B: library part "0805 22nF 50V", "0805 50V C0G 0.022uF 1% Automotive grade multilayer ceramic capacitor", Manufacturer=Murata, Manufacturer Part Number=GCM21B5C1H223FA16L, Supplier Part Number=81-GCM21B5C1H223FA6L, Category="Ceramic Capacitors", ComponentLink1Description=https://datasheet.octopart.com/GCM21B5C1H223FA16L-Murata-datasheet-155238815.pdf?src-supplier=Farnell, ComponentLink1URL=https://datasheet.octopart.com/GCM21B5C1H223FA16L-Murata-datasheet-155238815.pdf?src-supplier=Farnell, ComponentLink2Description=https://datasheet.octopart.com/GCM21B5C1H223FA16L-Murata-datasheet-12511495.pdf?src-supplier=TME, ComponentLink2URL=https://datasheet.octopart.com/GCM21B5C1H223FA16L-Murata-datasheet-12511495.pdf?src-supplier=TME, Pricing="1=0.53, 10=0.326, 50=0.326, 100=0.221, 1000=0.168, 10000=0.127 (USD)", RoHS=Yes, RoHS Compliant=Yes, Stock=27751, Supplier=Mouser
C66A C66B C66C C66D C66E C66F C66G C66H C119A C119B: library part "0603 3.3nF 50V", "Cap Ceramic 0.0033uF 50V C0G 1% Pad SMD 0603 125°C Automotive T/R", Case/Package=0603, Manufacturer=Murata, Manufacturer Part Number=GCM1885C1H332FA16D, Max Operating Temperature=125°C, Min Operating Temperature=-55°C, Supplier Part Number=81-GCM1885C1H332FA6D, Temperature Coefficient=30ppm/°C, Tolerance=1%, Voltage Rating=50V, Category="Ceramic Capacitors", ComponentLink1Description=https://datasheet.octopart.com/GCM1885C1H332FA16D-Murata-datasheet-12511495.pdf?src-supplier=TME, ComponentLink1URL=https://datasheet.octopart.com/GCM1885C1H332FA16D-Murata-datasheet-12511495.pdf?src-supplier=TME, Height=900um, Length=1.6mm, Material=Ceramic, Pricing="1=0.17, 10=0.096, 50=0.096, 100=0.06, 1000=0.041, 10000=0.029 (USD)", RoHS=Yes, RoHS Compliant=Yes, Stock=4669, Supplier=Mouser, Thickness=800um, Width=800um
C68A C68B C68C C68D C68E C68F C68G C68H C154A C154B: library part "0805 39nF 100V", "Multilayer Ceramic Capacitors MLCC - SMD/SMT 0805 C0G 39000pF 2% 100VDC", Case/Package=0805, Manufacturer=Murata, Manufacturer Part Number=GRM2195C2A393GE01J, Supplier Part Number=81-GRM2195C2A393GE1J, Voltage Rating (DC)=100V, Category="Ceramic Capacitors", ComponentLink1Description=https://datasheet.octopart.com/GRM2195C2A393GE01J-Murata-datasheet-165579666.pdf?src-supplier=TME, ComponentLink1URL=https://datasheet.octopart.com/GRM2195C2A393GE01J-Murata-datasheet-165579666.pdf?src-supplier=TME, Length=2mm, Pricing="1=0.43, 10=0.259, 50=0.259, 100=0.172, 500=0.16, 1000=0.127, 2500=0.109, 10000=0.098, 20000=0.096, 50000=0.093 (USD)", RoHS=No, Stock=9963, Supplier=Mouser, Thickness=850um, Width=1.25mm
C69A C69B C69C C69D C69E C69F C69G C69H C155A C155B: library part "0603 12nF 25V", "Cap Ceramic 0.012uF 25V C0G 1% Pad SMD 0603 125°C Extreme Low ESR T/R", Case Code (Imperial)=0603, Case Code (Metric)=1608, Dielectric Material=Ceramic, Manufacturer=KEMET, Manufacturer Part Number=C0603C123F3GACTU, Max Operating Temperature=125°C, Min Operating Temperature=-55°C, Package Quantity=4000, Supplier Part Number=80-C0603C123F3G, Temperature Coefficient=30ppm/°C, Tolerance=1%, Voltage Rating=25V, Case/Package=0603, Category="Ceramic Capacitors", ComponentLink1Description=http://www.mouser.com/ds/2/212/KEM_C1003_C0G_SMD-1101588.pdf?src-supplier=Mouser, ComponentLink1URL=http://www.mouser.com/ds/2/212/KEM_C1003_C0G_SMD-1101588.pdf?src-supplier=Mouser, ComponentLink2Description=https://datasheet.octopart.com/C0603C123F3GACTU-KEMET-datasheet-68331921.pdf?src-supplier=Farnell, ComponentLink2URL=https://datasheet.octopart.com/C0603C123F3GACTU-KEMET-datasheet-68331921.pdf?src-supplier=Farnell, ComponentLink3Description=https://datasheet.octopart.com/C0603C123F3GACTU-KEMET-datasheet-178088019.pdf?src-supplier=Element14, ComponentLink3URL=https://datasheet.octopart.com/C0603C123F3GACTU-KEMET-datasheet-178088019.pdf?src-supplier=Element14, ComponentLink4Description=https://datasheet.octopart.com/C0603C123F3GACTU-KEMET-datasheet-170576060.pdf?src-supplier=Newark, ComponentLink4URL=https://datasheet.octopart.com/C0603C123F3GACTU-KEMET-datasheet-170576060.pdf?src-supplier=Newark, ComponentLink5Description=https://datasheet.octopart.com/C0603C123F3GACTU-KEMET-datasheet-157246123.pdf?src-supplier=Electro+Sonic, ComponentLink5URL=https://datasheet.octopart.com/C0603C123F3GACTU-KEMET-datasheet-157246123.pdf?src-supplier=Electro+Sonic, Height=870um, Lead Free="Lead Free", Material=Ceramic, Packaging="Tape and Reel", Pricing="1=1.6, 10=1.07, 50=1.07, 100=0.752, 1000=0.622, 10000=0.509 (USD)", RoHS=Yes, RoHS Compliant=Yes, Series=C0603C, Stock=7993, Supplier=Mouser, Termination=SMD/SMT, Voltage Rating (DC)=25V
C71A C71B C71C C71D C71E C71F C71G C71H C72A C72B C72C C72D C72E C72F C72G C72H C75A C75B C75C C75D C75E C75F C75G C75H C157A C157B C175A C175B C176A C176B: library part "0704 100nF 50V", "Cap Cer 0.1UF 50V C0G/NP0 0704", Case/Package=705Case, Manufacturer=Murata, Manufacturer Part Number=GRMJN65C1H104GE01J, Max Operating Temperature=125°C, Min Operating Temperature=-55°C, Supplier Part Number=81-GRMJN65C1H104GE1J, Temperature Coefficient=30ppm/°C, Tolerance=2%, Voltage Rating=50V, Height=650um, Material=4241ConductorMaterial, Pricing="1=0.52, 10=0.317, 50=0.317, 100=0.211, 1000=0.175, 10000=0.126 (USD)", RoHS=No, Stock=3204, Supplier=Mouser
C73 C74 C92 C93 C131: library part CC1206_47UF_25V_20%_X5R, "Non-polarised capacitor", Case=1206, Manufacturer=TDK, Manufacturer Part Number=C3216X5R1E476M160AC, Tolerance=±20%, Voltage=25V, Author="CERN DEM JLC", Component Type=Standard, ComponentHeight=1.8mm, CreateDate=2013-11-20, HelpURL=\\cern.ch\dfs\Applications\Altium\Datasheets\CC1206_X5R_TDK_C.pdf, LatestRevisionDate=2013-11-20, Mounted=Yes, Part Description="SMD Multilayer Chip Ceramic Capacitor", Part Number=CC1206_47UF_25V_20%_X5R, Pin Count=2, SMD=Yes, Socket=No, Status=None, Table="Capacitors SMD", TC=X5R
C78A C78B C78C C78D C78E C78F C78G C78H C80A C80B: library part "0603 390nF 16V", "Cap Ceramic 0.39uF 16V X7R 5% Pad SMD 0603 125C T/R", Case Code (Imperial)=0603, Case Code (Metric)=1608, Dielectric Material=Ceramic, Manufacturer=KEMET, Manufacturer Part Number=C0603C394J4RACTU, Max Operating Temperature=125°C, Min Operating Temperature=-55°C, Package Quantity=4000, Supplier Part Number=80-C0603C394J4R, Temperature Coefficient=30ppm/°C, Tolerance=5%, Voltage Rating=16V, Case/Package=0603, Category="Ceramic Capacitors", ComponentLink1Description=http://www.mouser.com/ds/2/212/KEM_C1002_X7R_SMD-1102033.pdf?src-supplier=Mouser, ComponentLink1URL=http://www.mouser.com/ds/2/212/KEM_C1002_X7R_SMD-1102033.pdf?src-supplier=Mouser, ComponentLink2Description=https://datasheet.octopart.com/C0603C394J4RACTU-KEMET-datasheet-130256537.pdf?src-supplier=Farnell, ComponentLink2URL=https://datasheet.octopart.com/C0603C394J4RACTU-KEMET-datasheet-130256537.pdf?src-supplier=Farnell, ComponentLink3Description=https://datasheet.octopart.com/C0603C394J4RACTU-KEMET-datasheet-175422952.pdf?src-supplier=Newark, ComponentLink3URL=https://datasheet.octopart.com/C0603C394J4RACTU-KEMET-datasheet-175422952.pdf?src-supplier=Newark, ComponentLink4Description=https://datasheet.octopart.com/C0603C394J4RACTU-KEMET-datasheet-157246124.pdf?src-supplier=Electro+Sonic, ComponentLink4URL=https://datasheet.octopart.com/C0603C394J4RACTU-KEMET-datasheet-157246124.pdf?src-supplier=Electro+Sonic, Height=870um, Material=Ceramic, Packaging="Tape and Reel", Pricing="1=0.36, 10=0.213, 50=0.213, 100=0.14, 1000=0.102, 10000=0.077 (USD)", RoHS=Yes, RoHS Compliant=Yes, Series=C0603C, Supplier=Mouser, Termination=SMD/SMT, Voltage Rating (DC)=16V
  C78A C78B C78C C78D C78E C78F C78G C78H: Stock=11683
  C80A C80B: Stock=11668
C81A C81B C203 C212: library part CC0402_10NF_16V_10%_X7R, "Non-polarised capacitor", Case=0402, Manufacturer=GENERIC, Manufacturer1 ComponentHeight=0.55mm, Manufacturer1 Example=PHYCOMP, Manufacturer1 Part Number=223878715636, Tolerance=±10%, Voltage=16V, Author="CERN DEM JLC", Component Type=Standard, CreateDate=12/3/2007, HelpURL=\\cern.ch\dfs\Applications\Altium\Datasheets\CC0402_X7R_PHYCOMP.pdf, LatestRevisionDate=12/3/2007, Manufacturer Part Number=CC0402_10NF_16V_10%_X7R, Mounted=Yes, Part Description="SMD Multilayer Chip Ceramic Capacitor", Part Number=CC0402_10NF_16V_10%_X7R, Pin Count=2, Sense=No, SMD=Yes, Socket=No, Status="Not Recommended", TC=X7R
C82A C82B: library part "0603 680nF 16V", "Surface Mount Ceramic Multilayer Capacitor 0.68uF 5% X7R 16V 0603 Paper T/R", Case/Package=0603, Dielectric=X7R, Manufacturer=Yageo, Manufacturer Part Number=CC0603JRX7R7BB684, Supplier Part Number=13-CC0603JRX7R7BB684CT-ND, Voltage Rating (DC)=16V, Category="Ceramic Capacitors", Halogen Free="Halogen Free", Lead Free="Lead Free", Pricing="1=0.15, 10=0.086, 100=0.0527, 1000=0.03562 (USD)", RoHS=No, Stock=8893, Supplier=Digikey
C84A C84B: library part CC0402_22NF_50V_5%_X7R, "Non-polarised capacitor", Case=0402, Manufacturer=GENERIC, Manufacturer1 ComponentHeight=0.55mm, Manufacturer1 Example=KEMET, Manufacturer1 Part Number=C0402C223J5RAC, Tolerance=±5%, Voltage=50V, Author="CERN DEM BC", Component Type=Standard, CreateDate=7/15/2020, HelpURL=\\cern.ch\dfs\Applications\Altium\Datasheets\CC0402_X7R_KEMET.pdf, LatestRevisionDate=7/15/2020, Manufacturer Part Number=CC0402_22NF_50V_5%_X7R, Mounted=Yes, Part Description="SMD Multilayer Chip Ceramic Capacitor", Part Number=CC0402_22NF_50V_5%_X7R, Pin Count=2, Sense=No, SMD=Yes, Socket=No, Status=Preferred, TC=X7R
C85A C85B: library part "0805 1.5uF 16V", "Multilayer Ceramic Capacitors MLCC - SMD/SMT 16V 1.5uF X7R 0805 5% AEC-Q200", Manufacturer=KEMET, Manufacturer Part Number=C0805C155J4RECAUTO, Supplier Part Number=80-C0805C155J4RECAUT, Category="Ceramic Capacitors", ComponentLink1Description=https://api.kemet.com/component-edge/download/datasheet/C0805C155J4RECAUTO.pdf?src-supplier=Digikey, ComponentLink1URL=https://api.kemet.com/component-edge/download/datasheet/C0805C155J4RECAUTO.pdf?src-supplier=Digikey, Pricing="1=0.3, 10=0.178, 50=0.178, 100=0.115, 1000=0.083, 10000=0.062 (USD)", RoHS=Yes, RoHS Compliant=Yes, Stock=6068, Supplier=Mouser
C87A C87B: library part "0805 2.2uF 16V", "Multilayer Ceramic Capacitors MLCC - SMD/SMT 16V 2.2uF X7R 0805 5%View Simulation and SPICE Model in K-SIM", Manufacturer=KEMET, Manufacturer Part Number=C0805C225J4RECTU, Supplier Part Number=80-C0805C225J4RECTU, Category=LDO, ComponentLink1Description=https://datasheet.octopart.com/C0805C225J4RECTU-KEMET-datasheet-153706760.pdf?src-supplier=Farnell, ComponentLink1URL=https://datasheet.octopart.com/C0805C225J4RECTU-KEMET-datasheet-153706760.pdf?src-supplier=Farnell, Pricing="1=0.27, 10=0.161, 50=0.161, 100=0.103, 1000=0.074, 10000=0.055 (USD)", RoHS=Yes, RoHS Compliant=Yes, Stock=3475, Supplier=Mouser